# Allegro board SOLAR_15Nov18.brd
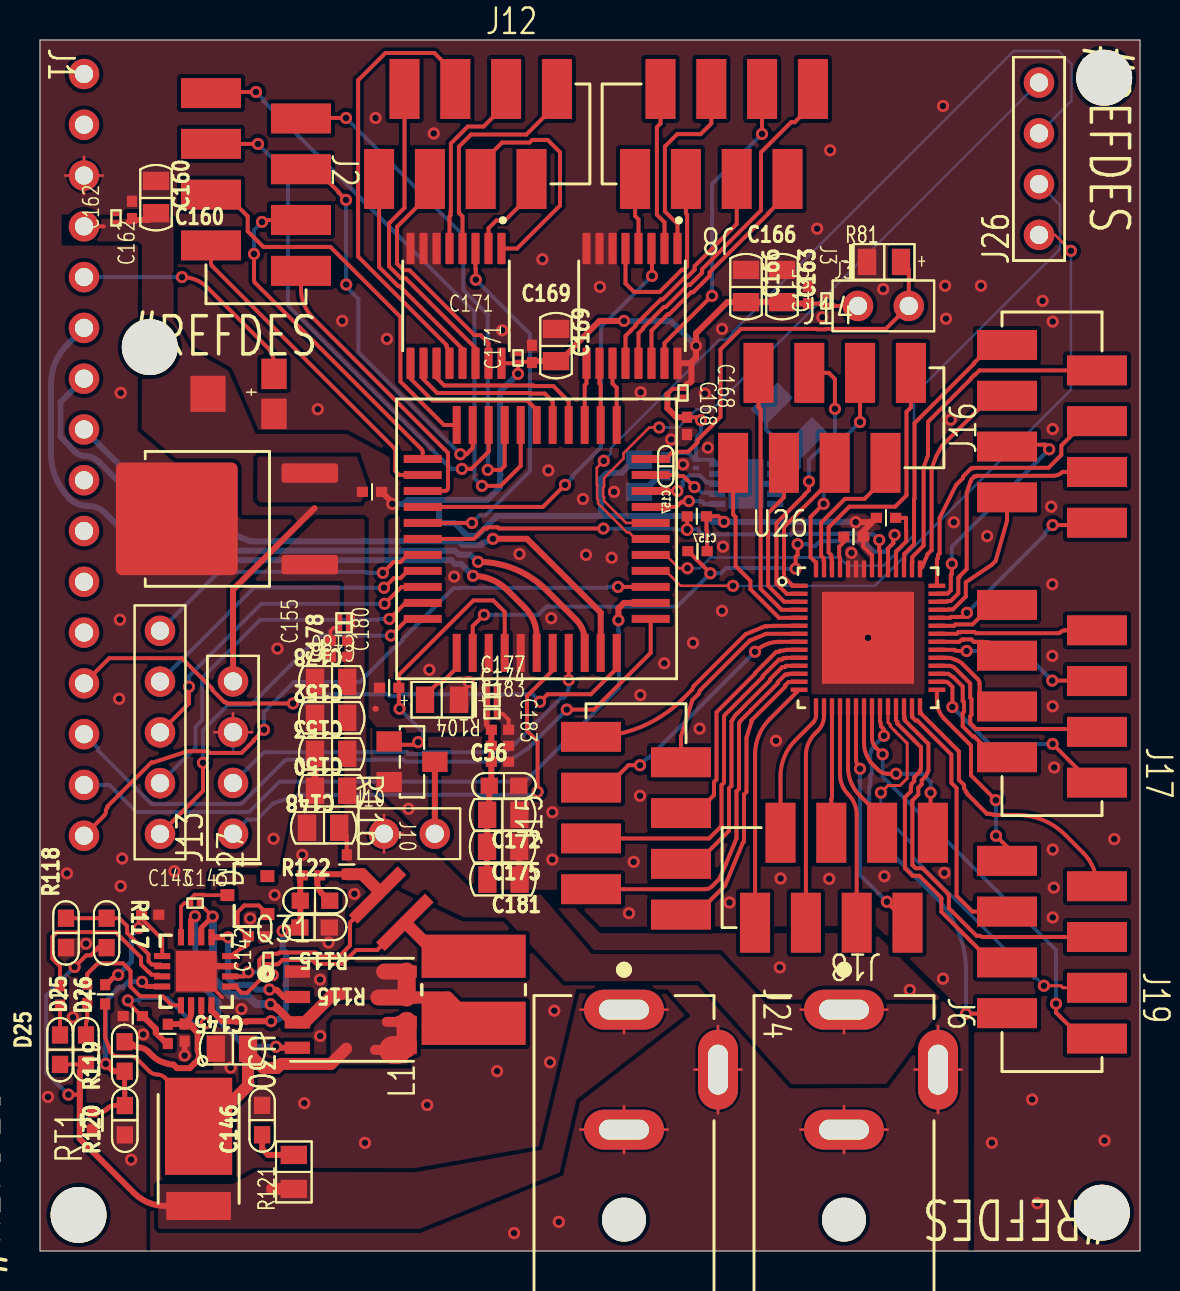
[diagram p0: board, top side]
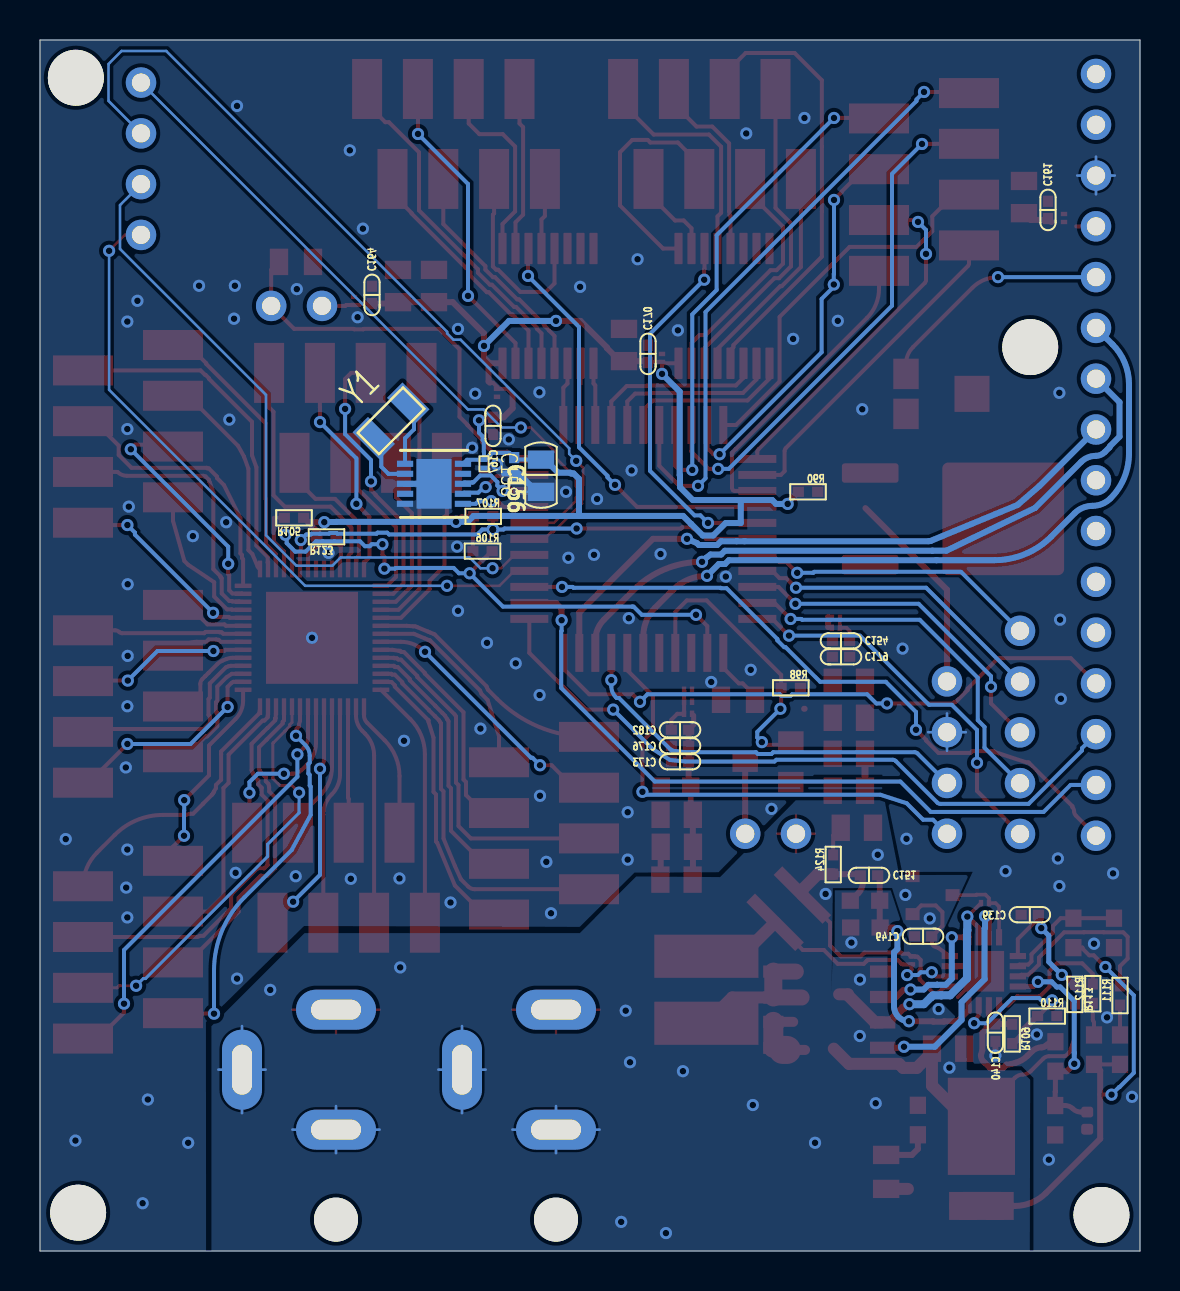
[diagram p1: board, bottom side, seen from below]

Outline 55 x 60.57 mm; copper layers: TOP, BOTTOM. Coordinates in mm from the lower left corner of the outline.
Outline path: 0,60.57 0,0 55,0 55,60.57 0,60.57

## Design rules (mm)
constraint set DEFAULT: min track width 0.127

## Placement (name value [footprint] x y rotation side)
C56  4.7u  [0603G_B]  23.2 23.27 0 top
C139  1u  [0402C_B]  5.51 16.82 0 top
C140  1u  [0402C_B]  7.23 10.92 270 top
C142  0.1uF  [0201]  11.4 14.54 90 top
C143  0.1uF  [0201]  7.75 17.4 0 top
C145  10u  [0805G]  9.64 10.12 180 top
C146  2.2uF  [0603G_B]  11.11 6.55 90 top
C148  4.7uF  [0805G]  14.2 21.17 180 top
C149  1u  [0402C_B]  10.85 15.74 0 top
C150  10u  [0805G]  14.6 23.02 180 top
C151  4.7uF  [0402C_B]  13.55 18.79 180 top
C152  10u  [0805G]  14.6 26.67 180 top
C153  10u  [0805G]  14.6 24.87 180 top
C154  1u  [0402C_B]  14.95 30.52 180 top
C155  0.1uF  [0201]  15.2 31.17 180 top
C156  10u  [0805G]  29.95 38.82 270 bottom
C157  1u  [0402C_B]  31.29 39.25 270 bottom
C158  0.1uF  [0201]  32.8 39.37 270 bottom
C160  10u  [0805G]  5.8 52.67 90 top
C161  1u  [0402C_B]  4.6 52.07 90 top
C162  0.1uF  [0201]  3.8 51.67 90 top
C163  10u  [0805G]  37.1 48.22 90 top
C164  1u  [0402C_B]  38.4 47.82 90 top
C165  0.1uF  [0201]  39.3 47.52 90 top
C166  10u  [0805G]  35.3 48.22 90 top
C167  1u  [0402C_B]  32.35 41.27 270 top
C168  0.1uF  [0201]  32.15 42.92 270 top
C169  10u  [0805G]  25.8 45.27 90 top
C170  1u  [0402C_B]  24.6 44.87 90 top
C171  0.1uF  [0201]  23.9 44.67 90 top
C172  10u  [0805G]  23.12 21.82 0 top
C173  1u  [0402C_B]  23 24.47 0 top
C174  0.1uF  [0201]  22.6 27.47 0 top
C175  10u  [0805G]  23.12 20.22 0 top
C176  1u  [0402C_B]  23 25.27 0 top
C177  0.1uF  [0201]  22.6 28.07 0 top
C178  10u  [0805G]  14.6 28.47 180 top
C179  1u  [0402C_B]  14.95 29.72 180 top
C180  0.1uF  [0201]  15.2 31.67 180 top
C181  10u  [0805G]  23.13 18.58 0 top
C182  1u  [0402C_B]  23 26.07 0 top
C183  0.1uF  [0201]  22.6 26.87 0 top
D25  150060GS75000  [0603G_B]  1 10.07 90 top
D26  150060RS75000  [0603G_B]  2.3 10.07 90 top
D27  BAT54C/SOT  [SOT23-R]  10.37 17.8 90 top
J1  LCD Conn  [JUMPER16X1]  2.2 58.87 270 top
J2  KEYPAD CONN  [HEADER_8_SMT_254MM]  10.8 53.47 270 top
J3  MagSensor CONN  [JUMPER2]  40.9 47.27 0 top
J6  CON2  [DC_JACK]  41.2 7.07 270 top
J8  HEADER 8  [HEADER_8_SMT_254MM]  34.2 55.87 180 top
J9  HEADER 5  [JUMPER5]  6 31.02 270 top
J10  Fan Conn  [JUMPER2]  17.2 20.87 0 top
J12  HEADER 8  [HEADER_8_SMT_254MM]  21.4 55.87 0 top
J13  HEADER 4  [JUMPER4]  9.65 20.87 90 top
J14  HEADER 8  [HEADER_8_SMT_254MM]  39.1 41.67 0 top
J15  HEADER 8  [HEADER_8_SMT_254MM]  29.8 21.27 90 top
J16  HEADER 8  [HEADER_8_SMT_254MM]  50.6 40.87 90 top
J17  HEADER 8  [HEADER_8_SMT_254MM]  50.6 27.87 270 top
J18  HEADER 8  [HEADER_8_SMT_254MM]  40.2 18.67 180 top
J19  HEADER 8  [HEADER_8_SMT_254MM]  50.6 15.07 270 top
J24  CON2  [DC_JACK]  30.2 7.07 270 top
J26  HEADER 4  [JUMPER4]  49.95 50.82 90 top
L1  10uH  [INDM5252X180N]  21.68 13.07 90 top
Q1  MOSFET N  [SOT23-3A]  18.6 24.47 270 top
Q31  Si7288  [MOSFET_SI7272DP-T1-GE3]  15.6 12.07 0 top
R80  858-35WR1KLFTR  [VARR]  10.6 42.87 90 top
R81  2.1K  [0805D]  42.2 49.47 0 top
R90  0  [0402R_B]  16.6 37.97 0 top
R98  10K  [0402R_B]  17.46 28.17 0 top
R104  100ohm  [0805D]  20.1 27.57 180 top
R105  1K  [0402R_B]  42.3 36.67 180 top
R106  1K  [0402R_B]  32.87 35 0 top
R107  1K  [0402R_B]  32.84 36.75 0 top
R109  0Ohm  [0402R_B]  6.39 10.86 90 top
R110  0Ohm  [0402R_B]  4.64 11.75 0 top
R111  10K  [0402R_B]  1 12.78 270 top
R112  10K  [0402R_B]  2.36 12.87 270 top
R113  10 Ohm  [0402R_B]  3.26 12.84 90 top
R115  270k  [0603G_B]  13.73 16.18 180 top
R116  30 mOhm  [CAPC1632X76N]  17.56 17.12 315 top
R117  499k  [0603G_B]  3.33 15.91 270 top
R118  47k  [0603G_B]  1.3 15.91 90 top
R119  5.23k  [0603G_B]  4.23 9.73 90 top
R120  30.1k  [0603G_B]  4.24 6.54 90 top
R121  2 Ohm  [0805R]  12.69 3.96 90 top
R122  499k  [0603G_B]  13.75 17.52 0 top
R123  0  [0402R_B]  40.67 35.72 180 top
R124  0Ohm  [0402R_B]  15.34 19.33 270 top
RT1  THERMISTOR  [CAPC1005X55N]  2.64 6.52 90 top
U17  PCF85063BTL  [DFN-10_DD]  35.3 38.37 180 bottom
U19  STC15_LQFP44  [LQFP-44]  24.84 35.62 0 top
U20  NCP5501UG  [DPAK229P990X238-3N]  11.35 36.62 90 top
U23  SN74LV4051A-Q1  [SOP65P640X120-16N]  20.8 47.27 270 top
U24  SN74LV4051A-Q1  [SOP65P640X120-16N]  29.6 47.27 270 top
U26  PI4IOE5V96248  [PI4IOE5V96248ZLEX-56N]  41.4 30.67 0 top
U28  BQ24650  [QFN50P350X350X100-17N]  7.81 13.99 0 top
U30  PDS1040L  [DIO_SBR10U200P5_13]  7.93 3.11 270 top
UNK#REFDES  -  [unnamed]  53.21 58.68 270 top
UNK#REFDES#2  -  [unnamed]  1.93 1.81 180 top
UNK#REFDES#3  -  [unnamed]  5.49 45.21 0 top
UNK#REFDES#4  -  [unnamed]  53.09 1.92 180 top
Y1  32.768kHz  [XTAL320X150X90]  37.45 41.52 135 bottom

## Library data of the parts
C56 C139 C140 C145 C149 C150 C152-C154 C156 C157 C160 C161 C163 C164 C166 C167 C169 C170 C172 C173 C175 C176 C178 C179 C181 C182 = CAP
C142 C143 C146 C148 C151 C155 C158 C162 C165 C168 C171 C174 C177 C180 C183 = CAPACITOR NON-POL
D25 D26 = LED
D27 = BAT54C/SOT
J1 = HEADER 16
J2 J8 J12 J14-J19 = HEADER 8
J3 = HEADER 2
J6 J24 = CON2_1
J9 = HEADER 5
J10 = CON2
J13 J26 = HEADER 4
L1 = INDUCTOR
Q1 = MOSFET N_1
Q31 = Si7288_0
R80 = RESISTOR VAR
R81 R104 = RESISTOR
R90 R98 R105-R107 R109-R113 R115-R124 = R
RT1 = THERMISTOR
U17 = PC85063BTL_1
U19 = STC15
U20 = NCP5501UG
U23 U24 = SN74LV4051A-Q1
U26 = PI4IOE5V96248
U28 = BQ24650_3
U30 = PDS1040L_0
Y1 = CRYSTAL

## Footprints (pads in the part's own frame, mm; a bottom-side part is the same pattern mirrored in y, then rotated)
0201
  rect 0.22x0.32 smd: 1(-0.203,0) 2(0.197,0)
0402C_B
  rect 0.559x0.508 smd: 1(-0.432,0) 2(0.432,0)
0402R_B
  rect 0.559x0.508 smd: 1(-0.483,0) 2(0.483,0)
0603G_B
  rect 0.864x0.813 smd: 1(-0.737,0) 2(0.737,0)
0805D
  rect 0.914x1.321 smd: 1(0.85,0) 2(-0.85,0)
0805G
  rect 0.914x1.321 smd: 1(-0.762,0) 2(0.85,0)
0805R
  rect 0.914x1.321 smd: 1(-0.85,0) 2(0.85,0)
CAPC1005X55N
  custom 0.54x0.6 smd: 1(-0.43,0) 2(0.43,0)
CAPC1632X76N
  rect 0.61x3.454 smd: 1(-0.965,0) 2(0.965,0)
DC_JACK
  round 2.2 hole 2.2 unplated: (5.5,-1)
  oval 4x2 hole 2.5x1: 1(-2,3.7)
  oval 2x4 hole 1x2.5: 2(1,-1) 3(-5,-1)
DFN-10_DD
  rect 0.813x0.305 smd: 1(-1.448,1) 2(-1.448,0.5) 3(-1.448,0) 4(-1.448,-0.5) 5(-1.448,-1) 6(1.448,-1) 7(1.448,-0.5) 8(1.448,0) 9(1.448,0.5) 10(1.448,1)
  rect 1.753x2.489 smd: 11(0,0)
DIO_SBR10U200P5_13
  rect 1.4x1.39 smd: 1(0.856,0.92) 2(0.856,-0.92)
  rect 4.86x3.36 smd: 3(-3.126,0)
DPAK229P990X238-3N
  custom 0.97x2.83 smd: 1(-2.29,-2.14) 3(2.29,-2.14)
  custom 5.63x6.09 smd: 4(0,4.51)
HEADER_8_SMT_254MM
  rect 1.5x3 smd: 1(-4.445,-2.25) 2(-3.175,2.25) 3(-1.905,-2.25) 4(-0.635,2.25) 5(0.635,-2.25) 6(1.905,2.25) 7(3.175,-2.25) 8(4.445,2.25)
INDM5252X180N
  rect 2.159x5.207 smd: 1(-1.676,0) 2(1.676,0)
JUMPER2
  round 1.524 hole 0.914: 1(0,0) 2(2.54,0)
JUMPER4
  round 1.524 hole 0.914: 1(0,0) 2(2.54,0) 3(5.08,0) 4(7.62,0)
JUMPER5
  round 1.524 hole 0.914: 1(0,0) 2(2.54,0) 3(5.08,0) 4(7.62,0) 5(10.16,0)
JUMPER16X1
  round 1.524 hole 0.914: 1(0,0) 2(2.54,0) 3(5.08,0) 4(7.62,0) 5(10.16,0) 6(12.7,0) 7(15.24,0) 8(17.78,0) 9(20.32,0) 10(22.86,0) 11(25.4,0) 12(27.94,0) 13(30.48,0) 14(33.02,0) 15(35.56,0) 16(38.1,0)
LQFP-44
  rect 1.9x0.4 smd: 1(-5.7,4) 2(-5.7,3.2) 3(-5.7,2.4) 4(-5.7,1.6) 5(-5.7,0.8) 6(-5.7,0) 7(-5.7,-0.8) 8(-5.7,-1.6) 9(-5.7,-2.4) 10(-5.7,-3.2) 11(-5.7,-4) 23(5.7,-4) 24(5.7,-3.2) 25(5.7,-2.4) 26(5.7,-1.6) 27(5.7,-0.8) 28(5.7,0) 29(5.7,0.8) 30(5.7,1.6) 31(5.7,2.4) 32(5.7,3.2) 33(5.7,4)
  rect 0.4x1.9 smd: 12(-4,-5.7) 13(-3.2,-5.7) 14(-2.4,-5.7) 15(-1.6,-5.7) 16(-0.8,-5.7) 17(0,-5.7) 18(0.8,-5.7) 19(1.6,-5.7) 20(2.4,-5.7) 21(3.2,-5.7) 22(4,-5.7) 34(4,5.7) 35(3.2,5.7) 36(2.4,5.7) 37(1.6,5.7) 38(0.8,5.7) 39(0,5.7) 40(-0.8,5.7) 41(-1.6,5.7) 42(-2.4,5.7) 43(-3.2,5.7) 44(-4,5.7)
MOSFET_SI7272DP-T1-GE3
  rect 1.27x0.61 smd: 1(-2.732,1.905) 2(-2.732,0.635) 3(-2.732,-0.635) 4(-2.732,-1.905)
  rect 1.02x0.61 smd: 5(2.732,-1.905) 6(2.732,-0.61) 7(2.732,0.61) 8(2.732,1.905)
PI4IOE5V96248ZLEX-56N
  custom 0.84x0.22 smd: 1(-3.445,2.6) 2(-3.445,2.2) 3(-3.445,1.8) 4(-3.445,1.4) 5(-3.445,1) 6(-3.445,0.6) 7(-3.445,0.2) 8(-3.445,-0.2) 9(-3.445,-0.6) 10(-3.445,-1) 11(-3.445,-1.4) 12(-3.445,-1.8) 13(-3.445,-2.2) 14(-3.445,-2.6) 29(3.445,-2.6) 30(3.445,-2.2) 31(3.445,-1.8) 32(3.445,-1.4) 33(3.445,-1) 34(3.445,-0.6) 35(3.445,-0.2) 36(3.445,0.2) 37(3.445,0.6) 38(3.445,1) 39(3.445,1.4) 40(3.445,1.8) 41(3.445,2.2) 42(3.445,2.6)
  custom 0.22x0.84 smd: 15(-2.6,-3.445) 16(-2.2,-3.445) 17(-1.8,-3.445) 18(-1.4,-3.445) 19(-1,-3.445) 20(-0.6,-3.445) 21(-0.2,-3.445) 22(0.2,-3.445) 23(0.6,-3.445) 24(1,-3.445) 25(1.4,-3.445) 26(1.8,-3.445) 27(2.2,-3.445) 28(2.6,-3.445) 43(2.6,3.445) 44(2.2,3.445) 45(1.8,3.445) 46(1.4,3.445) 47(1,3.445) 48(0.6,3.445) 49(0.2,3.445) 50(-0.2,3.445) 51(-0.6,3.445) 52(-1,3.445) 53(-1.4,3.445) 54(-1.8,3.445) 55(-2.2,3.445) 56(-2.6,3.445)
  rect 4.6x4.6 smd: 57(0,0)
QFN50P350X350X100-17N
  rect 0.813x0.305 smd: 1(-1.702,0.762) 2(-1.702,0.254) 3(-1.702,-0.254) 4(-1.702,-0.762) 9(1.702,-0.762) 10(1.702,-0.254) 11(1.702,0.254) 12(1.702,0.762)
  rect 0.305x0.813 smd: 5(-0.762,-1.702) 6(-0.254,-1.702) 7(0.254,-1.702) 8(0.762,-1.702) 13(0.762,1.702) 14(0.254,1.702) 15(-0.254,1.702) 16(-0.762,1.702)
  rect 2.032x2.032 smd: 17(0,0)
SOP65P640X120-16N
  custom 1.57x0.41 smd: 1(-2.87,2.275) 2(-2.87,1.625) 3(-2.87,0.975) 4(-2.87,0.325) 5(-2.87,-0.325) 6(-2.87,-0.975) 7(-2.87,-1.625) 8(-2.87,-2.275) 9(2.87,-2.275) 10(2.87,-1.625) 11(2.87,-0.975) 12(2.87,-0.325) 13(2.87,0.325) 14(2.87,0.975) 15(2.87,1.625) 16(2.87,2.275)
SOT23-3A
  rect 1.016x1.27 smd: 1(-1.016,-1.143) 2(1.016,-1.143) 3(0,1.143)
SOT23-R
  rect 0.6x0.7 smd: 1(-0.95,-1) 2(0.95,-1) 3(0,1)
unnamed
  round 2.794 hole 2.794: 1(0,0)
VARR
  rect 1.524x1.27 smd: 1(-1,-1.1) 2(1,-1.1)
  rect 1.803x1.753 smd: 3(0,2.2)
XTAL320X150X90
  rect 1.092x1.905 smd: 1(-1.219,0) 2(1.219,0)

## Nets
VCC: C56.1 C156.1 C157.1 C158.1 C160.1 C161.1 C162.1 C163.1 C164.1 C165.1 C166.1 C167.1 C168.1 C169.1 C170.1 C171.1 C172.1 C173.1 C174.1 C175.1 C176.1 C177.1 C181.1 C182.1 C183.1 J1.4 J3.1 J13.4 R80.3 R90.2 R98.1 R105.2 R106.2 R107.2 R123.1 U17.10 U19.14 U23.16 U24.16 U26.49
VIN_SOLAR: D25.1 D26.1 J24.3 R117.2 R121.1 U30.1 U30.2
0: C56.2 C139.2 C140.2 C145.2 C146.2 C148.2 C149.2 C150.2 C152.2 C153.2 C154.2 C155.2 C156.2 C157.2 C158.2 C160.2 C161.2 C162.2 C163.2 C164.2 C165.2 C166.2 C167.2 C168.2 C169.2 C170.2 C171.2 C172.2 C173.2 C174.2 C175.2 C176.2 C177.2 C178.2 C179.2 C180.2 C181.2 C182.2 C183.2 J1.3 J6.1 J6.2 J13.3 J24.1 J24.2 Q1.2(SOURCE) Q31.1 R80.1 R81.2 R104.2 R110.1 R115.1 R118.1 R120.1 RT1.1 U17.3 U17.5(VSS) U17.11 U19.16 U20.4 U23.6 U23.7 U23.8 U24.6 U24.7 U24.8 U26.50 U26.51 U26.52 U26.57 U28.11 U28.17
ADC0: U19.4 U24.3
ADC0_A: U19.34 U24.11
ADC0_B: U19.35 U24.10
ADC0_C: U19.36 U24.9
ADC0_I0: J8.1 U24.13
ADC0_I1: J8.2 U24.14
ADC0_I2: J8.3 U24.15
ADC0_I3: J8.4 U24.12
ADC0_I4: J8.5 U24.1
ADC0_I5: J8.6 U24.5
ADC0_I6: J8.7 U24.2
ADC0_I7: J8.8 U24.4(Y7)
ADC0_I8: J12.1 U23.13
ADC0_I9: J12.2 U23.14
ADC0_I10: J12.3 U23.15
ADC0_I11: J12.4 U23.12
ADC0_I12: J12.5 U23.1
ADC0_I13: J12.6 U23.5
ADC0_I14: J12.7 U23.2
ADC0_I15: J12.8 U23.4(Y7)
ADC1: U19.5 U23.3
ADC1_A: U19.37 U23.11
ADC1_B: U19.38 U23.10
ADC1_C: U19.39 U23.9
ADC2: J9.1 U19.7
ADC3: J9.2 U19.8
ADC4: J9.3 U19.9
ADC5: J9.4 U19.10
ADC6: J9.5 U19.11(XTAL2/RXD_3/ADC6/P1.6)
FAN+V: J10.2 Q1.3
KP1: J2.1 U19.40
KP2: J2.2 U19.41
KP3: J2.3 U19.42
KP4: J2.4 U19.43
KP5: J2.5 U19.44
KP6: J2.6 U19.1
KP7: J2.7 U19.2
KP8: J2.8 U19.3
LCD_CONTRAST: J1.5 R80.2(WIPER)
LCD_D5: J1.13 U19.22
LCD_D6: J1.14 U19.23
LCD_D7: J1.15 U19.24
LCD_D8: J1.16 U19.25
LCD_EN: J1.8 U19.21
LCD_RS: J1.6 U19.17
LCD_RW: J1.7 U19.20
LD_GRN_CHRG: D25.2(CATHODE) R111.2
LD_RD_CHRG: D26.2(CATHODE) R112.2
P5.5_FANCTRL: Q1.1 R98.2 U19.15
P23_MAGSENSOR: J3.2 R81.1 U19.33
PCF85063BTL_CE: U17.6 U19.30
PCF85063BTL_SCL: U17.7 U19.32
PCF85063BTL_SDIO: U17.8 U19.31
RTC_XTAL1: U17.1 Y1.2
RTC_XTAL2: U17.2 Y1.1
STAT1: R111.1 U28.3
STAT2: R112.1 U28.5
STC_IOEXPDR_SCL: R106.1 U19.13 U26.47
STC_IOEXPDR_SDA: R107.1 U19.6 U26.48
STC_RXD: J13.1 U19.18
STC_TXD: J13.2 U19.19
TEMPERATURE: R104.1 U19.12
V_5V_BEFORE_R: R90.1 U20.3(VOUT)
VMAIN_6V: C148.1 C150.1 C152.1 C153.1 C154.1 C155.1 C178.1 C179.1 C180.1 J6.3 J10.1 R124.1 U20.1
N5281104: R105.1 U26.46
N5281708: J16.1 U26.38
N5281710: J16.2 U26.39
N5281712: J16.3 U26.40
N5281714: J16.4 U26.41
N5281716: J16.5 U26.42
N5281718: J16.6 U26.43
N5281720: J16.7 U26.44
N5281722: J16.8 U26.45(IO5_7)
N5281756: J14.1 U26.5
N5281758: J14.2 U26.4
N5281760: J14.3 U26.3
N5281762: J14.4 U26.2
N5281764: J14.5 U26.1
N5281766: J14.6 U26.56
N5281768: J14.7 U26.55
N5281770: J14.8 U26.54
N5281960: J15.1 U26.13
N5281966: J15.2 U26.12
N5281972: J15.3 U26.11
N5281978: J15.4 U26.10
N5281984: J15.5 U26.9
N5281990: J15.6 U26.8
N5281996: J15.7 U26.7
N5282002: J15.8 U26.6
N5282607: J17.1 U26.37
N5282609: J17.2 U26.36
N5282611: J17.3 U26.35
N5282613: J17.4 U26.34
N5282615: J17.5 U26.33
N5282617: J17.6 U26.32
N5282619: J17.7 U26.31
N5282621: J17.8 U26.30
N5282705: J18.1 U26.21
N5282707: J18.2 U26.20
N5282709: J18.3 U26.19
N5282711: J18.4 U26.18
N5282713: J18.5 U26.17
N5282715: J18.6 U26.16
N5282717: J18.7 U26.15
N5282719: J18.8 U26.14
N5282803: J19.1 U26.29
N5282805: J19.2 U26.28
N5282807: J19.3 U26.27
N5282809: J19.4 U26.26
N5282811: J19.5 U26.25
N5282813: J19.6 U26.24
N5282815: J19.7 U26.23
N5282817: J19.8 U26.22
N5297541: C140.1 R109.2 R119.2 U28.6(VREF)
N5297885: C143.1 D27.3 U28.16
N5297889: C143.2 L1.1 Q31.3(S2) Q31.7 Q31.8 U28.14
N5298100: R109.1 R110.2 U28.7
N5300450: C149.1 D27.1 U28.12
N5300470: C142.1 L1.2 R116.2 U28.10
N5300474: C142.2 C151.1 R116.1 R122.2 R124.2 U28.9
N5300499: Q31.2 U28.13
N5300503: Q31.4 U28.15
N5300584: C151.2 R115.2 R122.1 U28.8
N5302120: C139.1 R113.2 U28.1
N5302799: C145.1 Q31.5 Q31.6 R113.1 U30.3
N5307205: R117.1 R118.2 U28.2
N5307428: R119.1 R120.2 RT1.2 U28.4
N5310551: C146.1 R121.2
N5327580: R123.2 U26.53
N5329171: J26.1 U19.26
N5329180: J26.2 U19.27
N5329189: J26.3 U19.28
N5329196: J26.4 U19.29

Pads without a net: D27 2; J1 1 2 9 10 11 12; U17 4 9; UNK#REFDES 1; UNK#REFDES#2 1; UNK#REFDES#3 1; UNK#REFDES#4 1

## Via types
v1: diameter 0.61, hole 0.33, TOP to BOTTOM, 214 vias

## Routing (per net, layer and track width the routed paths; a pad name or vN(x,y) marks a point on that pad's centre or on a via; arc(x,y) is an arc through that point)
VCC: length 102
  TOP w0.2: R106.2 33.36,36.02 33.32,36.05 R107.2 33.92,36.75 v1(34.2,36.47) ; U23.16 23.83,44.4 C171.1 ; U26.49 41.6,34.8 41.16,35.24 R123.1 ; C167.1 32.9,41.7 v1(33.05,41.55) ; C164.1 38.96,47.39 39.03,47.32 C165.1 39.69,47.32 39.73,47.27 J3.1 ; C171.1 23.9,43.87 ; C171.1 24.57,44.47 C170.1 ; J1.4 3.19,51.25 ; 32.51,43.43 32.35,43.43 32.15,43.23 C168.1 31.63,43.12 31.37,42.86
  TOP w0.25: 22.32,26.79 22.32,26.32 C182.1
  TOP w0.3: C164.1 37.17,47.39 C163.1 C166.1 34.36,47.46 32.8,45.9 v1(32.8,45.27) 32.8,44.69 32.51,44.4 32.51,44.4 ; C181.1 22.35,18.59 C175.1 22.36,20.22 C172.1 22.46,21.92 C56.1 22.57,23.37 C173.1 C176.1 C182.1 ; C167.1 31.82,41.7 31.37,42.15 31.37,42.86 ; 13.73,37.16 9.65,33.08 J13.4 ; 41.33,35.65 41.08,35.89 41.08,35.93 41.56,36.41 41.56,36.44 ; R90.2 17.62,37.44 v1(17.62,37.37) ; 32.51,44.4 32.57,44.34 32.57,43.49 32.51,43.43 ; 32.51,44.4 U24.16 ; 41.56,36.44 41.55,36.45 v1(40.79,36.45) ; 41.56,36.44 41.79,36.67 R105.2 ; C170.1 24.67,44.51 C169.1 26,44.51 26.66,45.16 26.66,45.2 27.98,46.52 v1(29.2,46.52) ; C160.1 5.46,51.57 4.67,51.57 C161.1 4.43,51.47 ; 16.79,27.12 16.77,27.12
  BOTTOM w0.2: C158.1 33.65,39.57 U17.10 ; C158.1 32.8,39.96 32.81,39.97 32.81,40.51 32.87,40.57 32.87,40.74 33.05,40.92 v1(33.05,41.55) ; C158.1 32.75,39.57 32.48,39.84 32.47,39.84 32.39,39.92 31.53,39.92 C157.1 31.19,39.58 30.26,39.58
  BOTTOM w0.3: 19.96,37.56 18.39,37.56 18.2,37.37 v1(17.62,37.37) ; 19.96,37.56 19.96,36.41 20.72,36.41 21.34,35.79 21.86,35.79 22.44,36.37 22.45,36.37 22.85,36.77 28.05,36.77 ; 19.96,37.56 22.36,37.56 23,38.2 23,38.79 23.02,38.81 23.02,42.99 v1(23.9,43.87) ; v1(40.79,36.45) 40.57,36.45 40.56,36.46 40.2,36.46 40.19,36.47 v1(34.2,36.47) 33.62,36.47 33.32,36.77 28.05,36.77 ; 28.05,36.77 28.05,38.62 28.32,38.89 28.45,38.89 28.49,38.93 29.09,38.93 29.75,39.58 C156.1 30.26,39.58 ; v1(29.2,46.52) 31.55,46.52 v1(32.8,45.27)
VIN_SOLAR: length 30
  TOP w0.127: 29.2,10.89 J24.3 ; J24.3 27.02,12.07 ; J24.3 31.38,12.07
  TOP w0.2: R117.2 2.88,15.17 2.88,15.17 2.88,15.13 2.54,14.79 2.31,14.79 v1(1.73,14.21) ; 1.99,7.83 1.98,7.82 v1(1.42,7.82) ; D25.1 D26.1
  TOP w0.3: D26.1 1.99,9.02 1.99,5.61 4.7,2.9 arc(5.42,2.42) 6.26,2.25 U30.2
  TOP w0.6: 11.6,3.11 R121.1
  TOP w1.4: U30.1 U30.2
  BOTTOM w0.2: v1(1.73,14.21) 0.31,12.79 0.31,8.91 1.02,8.2 1.05,8.2 v1(1.42,7.82)
0: length 84.2
  TOP w0.127: J13.3 9.65,26.89 ; J13.3 8.71,25.95 ; J13.3 10.59,25.95 ; 38.02,6.07 J6.2 ; J6.2 40.2,7.25 ; J6.2 42.38,6.07 ; J6.2 40.2,4.89 ; J24.1 35.08,9.07 ; J24.1 33.9,11.25 ; J24.1 33.9,6.89 ; J24.1 32.72,9.07 ; J24.2 29.2,7.25 ; J24.2 29.2,4.89 ; J24.2 27.02,6.07 ; J24.2 31.38,6.07 ; J1.3 3.14,53.79 ; J1.3 2.2,52.85 ; J1.3 1.26,53.79 ; J1.3 2.2,54.73 ; J6.1 46.08,9.07 ; J6.1 44.9,11.25 ; J6.1 43.72,9.07 ; J6.1 44.9,6.89 ; U28.11 9.51,14.24
  TOP w0.15: U28.17 7.81,13.8
  TOP w0.18: U28.17 9.11,12.69 ; C180.2 C155.2 14.68,31.17 14.52,31.01 C154.2
  TOP w0.2: C177.2 C174.2 C183.2 23.13,26.87 23.43,26.57 C182.2
  TOP w0.3: C140.2 v1(7.23,9.78) ; U28.11 8.09,14.24 7.84,13.99 ; C181.2 23.96,18.59 C175.2 ; U28.17 7.81,14.05
  TOP w0.35: C150.2 C153.2
  TOP w0.4: U28.17 7.84,13.99
  BOTTOM w0.127: J24.2 29.2,7.25 ; J24.2 31.38,6.07 ; J24.2 29.2,4.89 ; J24.2 27.02,6.07 ; J1.3 3.14,53.79 ; J1.3 2.2,52.85 ; J1.3 2.2,54.73 ; J1.3 1.26,53.79 ; 30.79,37.97 30.15,37.97 ; 8.71,25.95 J13.3 ; J13.3 10.59,25.95 ; J13.3 9.65,26.89 ; J13.3 9.65,25.01 ; 44.9,6.89 J6.1 ; J6.1 46.08,9.07 ; J6.1 43.72,9.07 ; J6.1 44.9,11.25 ; 33.9,6.89 J24.1 ; J24.1 35.08,9.07 ; J24.1 32.72,9.07 ; J24.1 33.9,11.25 ; 40.2,4.89 J6.2 ; J6.2 42.38,6.07 ; J6.2 40.2,7.25 ; J6.2 38.02,6.07
  BOTTOM w0.3: U17.3 U17.11 ; C156.2 30.15,37.97 31.07,38.89 31.8,38.89
  vias: v1(0.4,7.71) v1(1.35,18.89) v1(1.65,11.69) v1(2.3,15.37) v1(4.03,42.92) v1(4,31.58) v1(3.96,27.62) v1(4.03,18.25) v1(4.11,19.63) v1(4.56,4.57) v1(5.16,10.83) v1(6.72,19) v1(9.53,9.17) v1(10.07,12.1) v1(10.51,16.63) v1(11.68,20.62) v1(11.73,17.81) v1(11.87,30.13) v1(13.11,19.82) v1(13.22,7.39) v1(13.89,42.1) v1(14,13.58) v1(14.01,10.75) v1(14.43,15.43) v1(15.11,46.52) v1(15.72,17.86) v1(16.25,5.41) v1(16.78,56.67) v1(17.34,45.62) v1(18.43,22.12) v1(19.36,7.3) v1(19.47,29.07) v1(19.69,55.89) v1(20.71,33.73) v1(21.44,28.46) v1(22.85,9) v1(23.11,46.05) v1(23.7,0.9) v1(23.97,34.86) v1(25.12,49.6) v1(25.42,39.04) v1(25.5,9.44) v1(25.56,31.65) v1(25.62,21.95) v1(25.62,19.58) v1(25.72,12.02) v1(25.94,1.46) v1(27.15,37.61) v1(27.3,34.82) v1(28,48.22) v1(28.58,34.67) v1(28.7,37.97) v1(29.45,16.89) v1(29.68,19.46) v1(30.03,42.95) v1(30.02,27.81) v1(30,22.77) v1(31.21,29.39) v1(31.56,40.59) v1(32.15,39.34) v1(32.65,30.42) v1(32.98,26.13) v1(33.24,42.88) v1(33.39,40.18) v1(34.1,46.12) v1(34.15,35.23) v1(34.1,32.02) v1(34.47,17.43) v1(36.8,25.52) v1(37.03,18.63) v1(36.99,14.18) v1(38.86,51.13) v1(39.12,46.7) v1(39.51,55.05) v1(39.46,18.62) v1(40.57,34.92) v1(41.4,30.67) v1(42.16,48.11) v1(42.22,18.74) v1(43.49,13.06) v1(45.15,13.62) v1(45.15,57.27) v1(45.22,18.92) v1(45.26,48.28) v1(45.3,46.63) v1(45.53,41.58) v1(45.69,36.45) v1(47.05,48.28) v1(47.36,35.76) v1(47.59,5.41) v1(49.61,7.58) v1(49.87,2.39) v1(50.13,47.52) v1(50.63,46.49) v1(50.63,41.11) v1(50.56,37.23) v1(50.62,33.35) v1(50.62,29.77) v1(50.63,27.25) v1(50.63,20.08) v1(50.63,16.68) v1(50.71,24.19) v1(50.69,18.18) v1(53.23,5.52) v1(53.71,20.6)
ADC0: length 21.2
  TOP w0.2: v1(30.6,48.77) 30.6,50.12 U24.3 ; v1(26.25,38.32) 25.14,37.21 U19.4
  BOTTOM w0.2: v1(30.6,48.77) 28.05,46.22 28.05,40.2 26.63,38.78 26.63,38.7 v1(26.25,38.32)
ADC0_A: length 3.2
  TOP w0.2: U19.34 28.84,43.18 28.62,43.39 U24.11
ADC0_B: length 3.1
  TOP w0.2: U24.10 27.97,43.39 28.03,43.33 U19.35
ADC0_C: length 3.1
  TOP w0.2: U19.36 27.24,43.3 27.32,43.39 U24.9
ADC0_I0: length 17.6
  TOP w0.2: U24.13 29.93,45.89 30.15,46.12 30.15,46.17 31.2,47.22 31.29,47.22 32.4,48.33 32.5,48.33 33.11,48.93 33.11,49.11 36.05,52.05 36.05,54.96 37.55,56.46 37.73,56.46 38.65,57.37 J8.1
ADC0_I1: length 12.1
  TOP w0.2: U24.14 30.58,46.04 31.38,46.85 31.45,46.85 32.56,47.95 32.66,47.95 33.48,48.77 33.48,48.95 36.43,51.89 36.43,51.92 37.38,52.87 J8.2
ADC0_I2: length 15.8
  TOP w0.2: U24.15 31.23,45.41 33.6,47.79 v1(33.6,47.77) ; J8.3 36.1,58.11 v1(36.1,55.87)
  BOTTOM w0.2: v1(36.1,55.87) 33.6,53.37 v1(33.6,47.77)
ADC0_I3: length 11.6
  TOP w0.2: 34.84,53.62 34.84,51.37 32.73,49.26 32.73,49.09 32.35,48.7 32.25,48.7 31.14,47.6 31.04,47.6 29.78,46.33 29.78,46.28 29.55,46.05 29.55,46.04 29.27,45.77 U24.12
ADC0_I4: length 9.9
  TOP w0.2: J8.5 33.56,56.39 33.03,55.86 31.86,55.86 31.24,55.24 31.24,52 31.88,51.37 U24.1
ADC0_I5: length 9.9
  TOP w0.2: J8.6 32.29,51.89 32.36,51.83 32.36,49.24 32.19,49.08 32.09,49.08 30.98,47.97 29.7,47.97 29.27,48.4 U24.5
ADC0_I6: length 8.2
  TOP w0.2: J8.7 31.03,56.39 30.84,56.21 30.84,51.83 31.23,51.45 U24.2
ADC0_I7: length 3.6
  TOP w0.2: J8.8 29.75,51.76 29.93,51.59 U24.4
ADC0_I8: length 11
  TOP w0.2: J12.1 16.96,49.21 17.92,48.25 17.99,48.25 21.13,45.12 U23.13
ADC0_I9: length 16
  TOP w0.2: U23.14 21.78,45.16 18.28,48.65 18.05,48.65 17.45,49.25 17.45,51.39 17.52,51.47 17.52,51.47 18.22,52.17 J12.2
ADC0_I10: length 12.2
  TOP w0.2: J12.3 19.5,52.87 17.85,51.23 17.85,49.38 18.18,49.05 18.48,49.05 21.72,45.81 22.03,45.81 22.43,45.41 U23.15
ADC0_I11: length 22.7
  TOP w0.2: U23.12 20.47,45.06 20.33,45.21 20.33,45.31 15.91,49.73 15.91,51.99 15.9,52 15.9,55.24 15.91,55.25 15.91,58.56 17.27,59.92 19.71,59.92 20.76,58.87 20.76,58.12
ADC0_I12: length 11.9
  TOP w0.2: J12.5 22.03,54.37 23.1,55.44 24.48,55.44 24.61,55.57 25.39,55.57 26,54.96 26,52.29 23.85,50.14 U23.1
ADC0_I13: length 9.6
  TOP w0.2: J12.6 23.31,57.37 22.18,56.24 21.39,56.24 20.55,55.4 20.55,52 20.53,51.98 20.53,51.8 20.47,51.74 U23.5
ADC0_I14: length 4.6
  TOP w0.2: J12.7 24.57,52.87 23.25,51.54 22.82,51.54 22.43,51.15 U23.2
ADC0_I15: length 11.7
  TOP w0.2: J12.8 25.84,57.37 24.31,55.84 21.55,55.84 20.95,55.23 20.95,51.92 21.13,51.74 U23.4
ADC1: length 18.7
  TOP w0.2: U23.3 21.78,49.13 21.79,49.11 v1(21.79,48.58) ; v1(21.6,36.42) U19.5
  BOTTOM w0.2: v1(21.79,48.58) 24.5,45.87 24.5,39.02 22.27,36.79 21.98,36.79 v1(21.6,36.42)
ADC1_A: length 9
  TOP w0.2: U19.37 26.43,42.49 25.67,43.26 24.69,43.26 24.66,43.29 20.21,43.29 19.82,43.68 U23.11
ADC1_B: length 8.9
  TOP w0.2: U19.38 25.64,42.49 25.24,42.88 24.53,42.88 24.5,42.91 19.85,42.91 19.17,43.6 U23.10
ADC1_C: length 8.5
  TOP w0.2: U23.9 18.52,43.64 19.62,42.54 24.36,42.54 24.84,42.06 U19.39
ADC2: length 14.7
  TOP w0.2: v1(17.14,33.92) 17.67,34.45 18.02,34.45 18.38,34.81 U19.7
  BOTTOM w0.2: v1(17.14,33.92) 16.34,33.92 16.29,33.97 8.95,33.97 J9.1
ADC3: length 15.4
  TOP w0.2: U19.8 18.38,34.02 18.02,33.65 17.69,33.65 17.38,33.34 17.37,33.34 v1(17.2,33.18)
  BOTTOM w0.2: J9.2 10.69,33.18 v1(17.2,33.18)
ADC4: length 16.9
  TOP w0.2: U19.9 18.07,33.22 v1(17.23,32.37) ; J9.3 7.45,27.39 v1(7.45,28.22)
  BOTTOM w0.2: v1(17.23,32.37) 11.07,32.37 7.45,28.75 v1(7.45,28.22)
ADC5: length 18.7
  TOP w0.2: v1(17.47,31.61) 18.27,32.42 U19.10
  BOTTOM w0.2: J9.4 7.78,25.18 7.78,26.22 8.11,26.55 8.11,28.67 11.01,31.57 16.9,31.57 16.94,31.61 v1(17.47,31.61)
ADC6: length 19.4
  TOP w0.2: J9.5 8.15,23.01 v1(8.15,24.42) ; v1(17.55,30.78) 18.38,31.62 U19.11
  BOTTOM w0.2: v1(17.55,30.78) 14.01,30.78 10.55,27.32 9.41,27.32 8.15,26.06 v1(8.15,24.42)
FAN+V: length 3.6
  TOP w0.3: J10.2 19.74,21.91 19.74,21.91 Q1.3
KP1: length 31
  TOP w0.2: J2.1 8.61,57.97 v1(10.8,57.97) ; U19.40 24.03,39.27 23.03,38.27 v1(22.1,38.27)
  BOTTOM w0.2: v1(22.1,38.27) 21.72,38.65 21.72,46.97 11.18,57.51 11.18,57.59 v1(10.8,57.97)
KP2: length 25.8
  TOP w0.2: v1(22.39,39.07) 23.03,39.07 23.24,39.27 U19.41 ; v1(15.3,56.67) 13.07,56.67 J2.2
  BOTTOM w0.2: v1(15.3,56.67) 21.17,50.8 21.17,48.06 22.39,46.85 v1(22.39,39.07)
KP3: length 26.2
  TOP w0.2: J2.3 10.28,55.38 10.28,55.37 v1(10.9,55.37) ; U19.42 22.44,39.99 21.57,39.12 v1(21.09,39.12)
  BOTTOM w0.2: v1(21.09,39.12) 20.56,39.12 12.4,47.28 12.4,53.87 v1(10.9,55.37)
KP4: length 19.9
  TOP w0.2: v1(15.3,52.57) 14.92,52.95 14.92,52.98 13.8,54.11 J2.4 ; v1(21.02,39.85) 21.02,39.85 21.33,39.85 21.64,40.16 U19.43
  BOTTOM w0.2: v1(21.02,39.85) 15.92,44.95 15.92,47.62 15.31,48.23 v1(15.31,48.34) 15.31,48.87 15.3,48.88 v1(15.3,52.57)
KP5: length 19.4
  TOP w0.2: 8.55,52.83 9.3,52.83 10.39,51.75 10.39,51 11.17,50.22 14.52,50.22 18.02,46.72 18.02,43.49 20.2,41.31 U19.44
KP6: length 17.5
  TOP w0.2: U19.1 19.13,39.96 arc(19.12,40.04) 19.08,40.1 10.76,48.42 arc(10.72,48.48) 10.7,48.56 v1(10.7,49.87) ; v1(11.1,51.47) 11.19,51.56 J2.6
  BOTTOM w0.2: v1(10.7,49.87) 10.7,51.07 v1(11.1,51.47)
KP7: length 16.5
  TOP w0.2: J2.7 8.55,49.4 arc(8.57,49.32) 8.61,49.26 17.71,40.16 arc(17.75,40.09) 17.77,40.02 17.77,39 17.96,38.81 U19.2
KP8: length 15.2
  TOP w0.2: U19.3 20.26,38.02 arc(20.31,38.02) 20.35,38.05 arc(20.39,38.11) 20.4,38.18 20.4,39.87 20.38,39.89 20.38,39.94 20.21,40.12 20.2,40.12 13.65,46.67 arc(13.21,47.34) 13.05,48.12 13.05,49.02
LCD_CONTRAST: length 12
  TOP w0.2: R80.2 11.7,44.36 arc(11.61,44.82) 11.35,45.21 8.38,48.18 arc(7.79,48.57) v1(7.1,48.71)
  BOTTOM w0.2: v1(7.1,48.71) J1.5
LCD_D5: length 30
  TOP w0.2: v1(25,27.47) 25.38,27.85 27.54,27.85 28.84,29.14 28.84,29.91 ; J1.13 3.46,29.65 7.09,29.65 8.61,28.13 8.61,28.06 9.22,27.45 9.29,27.45 9.36,27.39 v1(12.65,27.39)
  BOTTOM w0.2: v1(12.65,27.39) 13.18,27.39 13.64,27.85 17.39,27.85 17.48,27.76 17.92,27.76 18.01,27.85 24.62,27.85 v1(25,27.47)
LCD_D6: length 34.6
  TOP w0.2: U19.23 30.53,29.92 27.7,27.08 v1(26.34,27.08)
  BOTTOM w0.2: v1(26.34,27.08) 24.38,25.12 23.5,24.56 22.73,24.48 18.27,24.48 18.19,24.57 12.36,24.57 arc(12.28,24.55) 12.22,24.51 10.14,22.43 arc(10.06,22.38) 9.97,22.36 5.57,22.36 2.9,25.03 2.9,25.15 J1.14
LCD_D7: length 35.6
  TOP w0.3: v1(28.92,31.55) 28.92,32.13 29.2,32.42 U19.24
  BOTTOM w0.2: v1(28.92,31.55) 28.92,31.02 28.94,31 28.94,28.16 24.26,23.48 11.98,23.48 10.46,21.96 4.82,21.96 3.47,23.31 J1.15
LCD_D8: length 34.2
  TOP w0.2: v1(28.9,33.22) U19.25 ; v1(11.2,26.07) 10.69,25.56 10.69,25.52 10.08,24.91 8.48,24.91 8.39,25 7.31,25 7.27,24.96 5.67,24.44 5.57,24.44 3.38,22.25 3.38,22.19 arc(3.32,22.1) 3.29,21.99 arc(3.27,21.87) 3.21,21.78 J1.16
  BOTTOM w0.2: v1(28.9,33.22) 28.37,33.22 28.32,33.17 20.97,33.17 20.95,33.15 20.67,33.15 18.13,30.61 18.13,30.54 17.79,30.2 17.72,30.2 15.99,28.47 12.71,28.47 11.2,26.96 v1(11.2,26.07)
LCD_EN: length 31.4
  TOP w0.3: v1(22.65,35.62) 24.35,35.62 28.03,31.94 28.03,29.91
  BOTTOM w0.3: J1.8 5.04,38.25 6.12,37.31 10.48,35.51 10.57,35.5 19.77,35.5 20.95,35.5 21.14,35.31 22.06,35.31 22.15,35.41 v1(22.65,35.62)
LCD_RS: length 36.4
  TOP w0.3: 24.84,29.91 24.84,30.75 arc(24.68,31.52) 24.24,32.18 23.36,33.06 arc(22.57,33.59) v1(21.65,33.77)
  BOTTOM w0.3: v1(21.65,33.77) 21.06,34.36 20.75,34.36 20.56,34.55 10.18,34.55 10.18,34.55 7.28,34.55 arc(5.74,34.86) 4.44,35.73 3.27,36.9 arc(2.86,37.17) 2.38,37.27 arc(1.89,37.37) 1.48,37.64 arc(0.79,38.67) 0.55,39.88 0.55,43.35 arc(0.76,44.43) 1.38,45.35 J1.6
LCD_RW: length 34.1
  TOP w0.3: 27.24,29.91 27.24,30.53 arc(27.12,31.1) 26.8,31.58 25.33,33.05 arc(23.75,34.1) v1(21.9,34.47)
  BOTTOM w0.3: v1(21.9,34.47) 21.72,34.65 21.47,34.84 20.95,34.84 20.76,35.02 10.38,35.02 10.37,35.03 9.68,35.03 5.25,37.16 2.94,39.47 arc(2.61,39.69) 2.21,39.77 arc(1.97,39.82) 1.77,39.95 1.53,40.19 1.49,40.26 1.03,40.73 1.03,42.46 J1.7
LD_GRN_CHRG: length 1.5
  TOP w0.2: R111.2 D25.2
LD_RD_CHRG: length 1.6
  TOP w0.2: D26.2 2.3,11.42 arc(2.31,11.46) 2.33,11.5 arc(2.35,11.53) 2.36,11.57 R112.2
P5.5_FANCTRL: length 14.6
  TOP w0.2: 23.24,29.91 23.24,31.96 22.66,32.54 21.67,32.54 17.94,28.81 R98.2 17.94,27.16 v1(17.98,27.12) ; v1(18.91,25.45) 18.78,25.32 17.62,25.32 Q1.1
  BOTTOM w0.2: v1(17.98,27.12) 19.14,25.96 19.14,25.68 v1(18.91,25.45)
P23_MAGSENSOR: length 20.5
  TOP w0.2: U19.33 31.28,39.62 31.65,39.98 32.41,39.98 32.88,40.44 32.88,40.56 33.63,41.31 33.63,41.33 34.02,41.72 34.02,45.09 35.05,46.12 38.82,46.12 38.84,46.1 39.28,46.1 39.3,46.12 42.29,46.12 J3.2 43.44,49.08 R81.1
PCF85063BTL_CE: length 3.5
  TOP w0.2: U19.30 31.82,37.21 32.04,37.44 32.07,37.44 32.11,37.48 32.41,37.48 v1(32.44,37.51)
  BOTTOM w0.2: v1(32.44,37.51) 32.97,37.51 32.99,37.49 33.1,37.49 33.22,37.37 U17.6
PCF85063BTL_SCL: length 3.7
  TOP w0.2: U19.32 31.86,38.81 31.91,38.76 32.16,38.76 32.34,38.58 32.34,38.58 v1(32.72,38.21)
  BOTTOM w0.2: v1(32.72,38.21) 32.81,38.21 33.09,37.93 33.79,37.93 U17.7
PCF85063BTL_SDIO: length 3.9
  TOP w0.2: v1(31.87,38.02) U19.31
  BOTTOM w0.2: U17.8 33.78,38.44 33.4,38.44 33.39,38.44 33.33,38.44 32.99,38.79 32.46,38.79 32.13,38.46 32.13,38.28 v1(31.87,38.02)
RTC_XTAL1: length 3.3
  BOTTOM w0.2: U17.1 36.75,40.65 36.3,41.1 36.3,42.09 Y1.2
RTC_XTAL2: length 2.9
  BOTTOM w0.2: U17.2 37.58,38.87 37.93,39.22 37.93,40.28 Y1.1
STAT1: length 9.3
  TOP w0.2: U28.3 6.01,13.74 5.93,13.82 5.59,13.82 5.45,13.95 5.43,13.95 5.05,14.33 5.05,14.68 3.79,15.94 2.81,15.94 2.8,15.95 1.83,15.95 1.82,15.94 0.84,15.94 0.62,15.72 0.62,14.63 1,14.25 R111.1
STAT2: length 6.7
  TOP w0.2: U28.5 6.59,12.29 6.14,12.74 5.01,12.74 4.53,13.22 4.53,13.99 4.49,14.03 4.49,14.05 4.15,14.39 2.89,14.39 2.36,13.86 R112.1
STC_IOEXPDR_SCL: length 29.2
  TOP w0.2: v1(37.88,35.35) 37.88,34.82 37.78,34.72 v1(37.78,34.13) ; R106.1 32.42,35 32.83,34.59 32.83,34.59 v1(33.52,33.9) ; 21.64,29.91 21.64,31.26 v1(22.2,31.82) ; U26.47 42.4,35.14 42.66,35.4 42.66,35.75 v1(42.73,35.82)
  BOTTOM w0.2: v1(22.2,31.82) 24.91,31.82 25.32,32.23 25.39,32.23 31.85,32.23 v1(33.52,33.9) 34.05,33.9 34.32,34.16 37.21,34.16 37.25,34.13 v1(37.78,34.13) ; v1(42.73,35.82) 42.66,35.75 42.66,35.4 42.24,34.98 41.72,34.98 41.2,35.5 40.85,35.5 40.85,35.5 40.29,35.5 40.29,35.5 39,35.5 38.75,35.25 38.51,35.25 38.41,35.35 v1(37.88,35.35)
STC_IOEXPDR_SDA: length 25.6
  TOP w0.2: v1(28.17,36.14) 22.95,36.14 22.89,36.2 22.41,36.2 22.35,36.14 22.21,36.14 21.69,35.62 U19.6 ; U26.48 42,34.99 41.96,35.03 v1(41.96,35.56) ; R107.1 v1(32.36,36.09)
  BOTTOM w0.2: v1(28.17,36.14) 31.78,36.14 31.83,36.09 v1(32.36,36.09) ; v1(32.35,36.09) 32.88,36.09 33.13,35.84 37.55,35.84 37.64,35.93 38.12,35.93 38.18,35.87 40.13,35.87 40.17,35.91 40.5,35.91 40.54,35.87 41.01,35.87 41.42,35.87 41.46,35.84 41.68,35.84 v1(41.96,35.56)
  vias: v1(32.36,36.09)
STC_RXD: length 23.7
  TOP w0.2: 25.64,29.91 25.64,29.04 24.35,27.76 24.35,26.02 24.88,25.49 v1(24.88,22.97)
  BOTTOM w0.2: v1(24.88,22.97) 24.73,22.82 12.98,22.82 11.67,22.4 10.84,21.57 10.35,21.57 J13.1
STC_TXD: length 20.6
  TOP w0.2: 26.43,29.91 v1(26.43,28.55)
  BOTTOM w0.2: J13.2 11.13,24.89 arc(11.2,24.93) 11.27,24.95 18.34,24.95 18.43,24.86 19.11,24.86 19.2,24.95 22.72,24.95 23.21,25 23.28,25 23.45,25.07 23.48,25.09 26.05,27.66 26.17,27.66 26.21,27.7 arc(26.38,27.95) 26.43,28.24 v1(26.43,28.55)
TEMPERATURE: length 3.1
  TOP w0.2: R104.1 19.25,27.77 19.87,28.39 20.06,28.39 20.84,29.16 20.84,29.91
VMAIN_6V: length 11.3
  TOP w0.127: J6.3 42.38,12.07 ; J6.3 40.2,10.89 ; J6.3 38.02,12.07 ; 16.26,20.87 J10.1 ; J10.1 18.14,20.87 ; J10.1 17.2,21.81 ; J10.1 17.2,19.93
  TOP w0.2: R124.1 15.34,20.79 C148.1
  TOP w0.3: 15.59,31.71 15.59,31.21
N5281104: length 3.3
  TOP w0.2: U26.46 42.8,34.98 43.31,35.49 43.31,36.06 43.3,36.07 43.3,36.66 43.29,36.67 R105.1
N5281708: length 10
  TOP w0.2: v1(46.35,31.92) 46.14,31.71 45.56,31.71 45.51,31.67 U26.38 ; v1(50.63,36.31) 52.73,36.31 J16.1
  BOTTOM w0.2: v1(50.63,36.31) 50.25,35.93 50.25,35.83 v1(46.35,31.92)
N5281710: length 7.5
  TOP w0.2: J16.2 48.35,36.52 47.78,34.51 47.6,34.33 46.29,33.45 46.29,32.74 45.64,32.09 45.41,32.09 45.39,32.07 U26.39
N5281712: length 13.6
  TOP w0.2: U26.40 45.03,32.47 45.04,32.48 45.38,32.48 45.4,32.51 45.53,32.51 45.92,32.89 45.92,33.65 45.97,33.68 45.97,33.72 45.99,33.76 46.33,34.11 46.33,37.93 46.51,38.45 46.55,38.49 46.55,38.57 46.73,38.75 46.8,38.75 46.83,38.77 50.66,38.77 arc(50.91,38.82) 51.12,38.97 J16.3
N5281714: length 12.1
  TOP w0.2: U26.41 44.9,32.87 44.91,32.88 45.38,32.88 45.54,33.05 45.54,33.8 45.59,33.85 v1(45.59,34.37) ; v1(50.46,40.1) 50.46,40.13 50.26,40.33 48.45,40.33 J16.4
  BOTTOM w0.2: v1(45.59,34.37) 45.59,35.23 v1(50.46,40.1)
N5281716: length 13.9
  TOP w0.2: U26.42 44.84,34.6 44.9,34.66 44.9,34.81 44.98,34.89 44.98,36.66 45.8,38.31 46.15,38.66 46.15,38.74 46.56,39.15 46.64,39.15 46.66,39.17 50.42,39.17 51.06,39.81 51.06,40.28 52.15,41.36 arc(52.49,41.47) J16.5
N5281718: length 10.7
  TOP w0.2: 44.01,34.12 U26.43 arc(44.07,34.16) 44.12,34.23 44.38,34.86 44.58,35.06 44.58,39.13 44.8,39.73 44.8,39.73 45.1,40.27 47.34,42.51 arc(47.63,42.71) 47.98,42.78 J16.6
N5281720: length 17.2
  TOP w0.2: U26.44 43.6,34.42 43.61,34.43 43.61,34.71 44.18,35.28 44.18,39.2 44.4,39.8 44.4,41.47 46.55,43.62 46.55,43.65 46.73,43.83 46.75,43.83 46.97,44.05 J16.7
N5281722: length 13.8
  TOP w0.2: J16.8 47.6,45.31 46.69,44.4 46.69,44.37 43.73,41.4 43.73,37.63 43.7,37.61 43.7,35.35 43.21,34.86 43.21,34.56 43.2,34.55 U26.45
N5281756: length 9.7
  TOP w0.2: J14.1 34.66,36.84 34.78,36.71 34.78,34.26 35.52,33.52 35.52,33.1 36.95,31.67 U26.5
N5281758: length 13.2
  TOP w0.2: J14.2 35.93,42.19 36.03,42.09 36.03,33.12 37.08,32.07 U26.4
N5281760: length 8.4
  TOP w0.2: U26.3 37.21,32.47 36.41,33.28 36.41,36.9 37.19,37.69 J14.3
N5281762: length 14.2
  TOP w0.2: v1(39.75,42.12) 39.75,43.62 39.44,43.92 J14.4 ; v1(38.45,38.49) 38.45,38.06 38.22,37.83 38.22,37.81 36.83,36.41 36.83,33.39 37.34,32.87 U26.2
  BOTTOM w0.2: v1(38.45,38.49) 38.45,39.56 39.75,40.86 v1(39.75,42.12)
N5281764: length 7.7
  TOP w0.2: 39.74,39.42 39.74,38.75 37.2,36.21 37.2,33.71 37.64,33.27 U26.1
N5281766: length 10.9
  TOP w0.2: v1(41,41.46) 41,42.19 41,42.19 J14.6 ; v1(39.18,37.37) 38.53,36.72 38.53,34.7 38.8,34.43 U26.56
  BOTTOM w0.2: v1(41,41.46) 39.18,39.64 v1(39.18,37.37)
N5281768: length 7.3
  TOP w0.2: J14.7 42.28,38.67 41.22,37.62 40.25,37.62 39.06,36.43 39.06,34.78 39.19,34.65 39.19,34.52 39.2,34.5 U26.55
N5281770: length 12.9
  TOP w0.2: J14.8 43.54,42.19 43.33,41.97 43.33,37.8 42.76,37.23 40.47,37.23 39.43,36.19 39.43,34.93 39.56,34.8 39.56,34.67 39.59,34.65 39.59,34.13 U26.54
N5281960: length 14.5
  TOP w0.2: J15.1 32.42,16.83 arc(32.77,16.89) 33.06,17.09 34.26,18.28 35.14,20.42 35.2,20.48 35.2,22.83 35.32,22.96 35.32,25.68 35.58,26.48 35.58,26.55 37.26,28.23 37.26,28.29 37.42,28.46 37.55,28.46 37.57,28.47 U26.13
N5281966: length 18.7
  TOP w0.2: U26.12 37.44,28.87 37.4,28.83 37.27,28.83 36.88,28.45 36.88,28.39 35.55,27.06 35.55,27.05 35.25,26.75 35.05,26.55 34.96,26.4 34.95,26.39 34.95,23.11 34.82,22.99 34.82,20.63 34.26,19.27 33.96,18.6 33.59,18.23 arc(33.44,18.13) 33.27,18.09 J15.2
N5281972: length 13.2
  TOP w0.2: J15.3 32.42,19.37 arc(32.77,19.43) 33.06,19.63 34.45,21.02 34.45,23.15 34.57,23.27 34.57,26.49 34.64,26.6 34.75,26.78 34.87,26.9 34.87,26.9 35.23,27.26 35.24,27.27 36.51,28.54 36.51,28.61 37.11,29.21 37.24,29.21 37.27,29.23 37.31,29.27 U26.11
N5281978: length 17.3
  TOP w0.2: 27.55,20.63 33.45,20.63 34.07,21.26 34.07,23.3 34.2,23.43 34.2,26.74 34.27,26.84 36.13,28.7 36.13,28.76 36.95,29.58 37.09,29.58 37.15,29.65 37.28,29.65 37.31,29.67 U26.10
N5281984: length 11.6
  TOP w0.2: J15.5 32.8,21.91 33.7,22.81 33.7,23.46 33.82,23.58 33.82,26.94 35.76,28.88 35.76,28.92 36.8,29.96 36.94,29.97 36.96,29.98 37,30.02 37.06,30.02 37.38,30.07 U26.9
N5281990: length 13.4
  TOP w0.2: v1(30,24.3) 29.42,24.3 28.3,23.18 J15.6 ; U26.8 36.96,30.47 arc(36.3,30.34) v1(35.75,29.97)
  BOTTOM w0.2: v1(30,24.3) 30.38,24.67 30.45,24.67 v1(35.75,29.97)
N5281996: length 9.9
  TOP w0.2: U26.7 36.31,30.87 36.28,30.85 35.76,30.64 35.49,30.53 33,28.04 32.93,27.86 32.62,27.56 32.05,25.75 J15.7
N5282002: length 12.4
  TOP w0.2: U26.6 36.67,31.27 36.35,31.24 36.24,31.24 35.61,30.99 35.27,30.84 32.68,28.25 32.61,28.08 32.15,27.62 arc(30.04,26.21) J15.8
N5282607: length 3.9
  TOP w0.2: U26.37 45.71,31.27 45.78,31.34 46.62,31.34 47.6,32.31 J17.1
N5282609: length 8.1
  TOP w0.2: U26.36 45.84,30.87 45.91,30.94 46.02,30.94 46.04,30.96 46.73,30.96 46.79,30.9 50.89,30.9 arc(50.97,30.91) 51.04,30.96 arc(51.13,31.02) 51.25,31.05 J17.2
N5282611: length 3.8
  TOP w0.2: U26.35 45.97,30.47 46.07,30.57 46.17,30.57 46.19,30.59 46.57,30.59 46.69,30.47 47.16,30.47 arc(47.62,30.38) 48,30.12 J17.3
N5282613: length 8.7
  TOP w0.2: U26.34 45.74,30.07 45.8,30.01 v1(46.33,30.01) ; v1(50.61,28.53) 52.82,28.53 J17.4
  BOTTOM w0.2: v1(46.33,30.01) 49.13,30.01 v1(50.61,28.53)
N5282615: length 4.7
  TOP w0.2: U26.33 45.37,29.67 arc(45.53,29.65) 45.69,29.61 45.88,29.53 arc(46.01,29.46) 46.13,29.36 46.58,28.91 46.58,28.91 46.74,28.75 46.74,28.75 46.88,28.61 arc(46.96,28.5) 46.98,28.37 46.98,27.89 47.07,27.77 47.07,27.77 arc(47.66,27.37) J17.5
N5282617: length 10.6
  TOP w0.2: U26.32 45.46,29.27 45.58,29.25 45.71,29.19 46.51,28.39 46.51,27.67 46.57,27.61 46.57,26.81 46.51,26.75 46.51,26.4 46.8,26.11 52.52,26.11 52.57,26.16 arc(52.65,26.14) 52.71,26.1 J17.6
N5282619: length 6.4
  TOP w0.2: U26.31 45.41,28.87 45.67,28.7 46.13,28.23 46.13,27.52 46.2,27.45 46.2,26.97 46.13,26.91 46.13,26.25 46.65,25.74 46.72,25.74 47.33,25.12 arc(47.8,24.8) J17.7
N5282621: length 10.7
  TOP w0.2: v1(50.63,25.36) 52.56,23.43 J17.8 ; v1(45.62,27.21) 45.62,28.22 45.43,28.41 45.33,28.47 U26.30
  BOTTOM w0.2: v1(50.63,25.36) 47.47,25.36 v1(45.62,27.21)
N5282705: length 8.8
  TOP w0.2: v1(42.8,23.87) 42.77,23.87 42.38,23.87 arc(42.12,23.92) 41.9,24.07 41.65,24.32 arc(41.32,24.82) 41.2,25.41 U26.21 ; v1(44.53,22.92) 44.53,21.04 J18.1
  BOTTOM w0.2: v1(44.53,22.92) 44.53,23.45 44.11,23.87 v1(42.8,23.87)
N5282707: length 11.8
  TOP w0.2: U26.20 40.8,24.6 arc(40.85,24.34) v1(41,24.12) ; J18.2 42.34,17.45 v1(42.34,17.47)
  BOTTOM w0.2: v1(41,24.12) 41,18.81 v1(42.34,17.47)
N5282709: length 6.9
  TOP w0.2: J18.3 42.1,21.29 arc(42.04,21.64) 41.84,21.93 40.98,22.79 arc(40.55,23.44) 40.4,24.2 U26.19
N5282711: length 11
  TOP w0.2: 40.84,16.42 40.84,21.83 arc(40.73,22.37) 40.42,22.83 arc(40.11,23.3) 40,23.84 U26.18
N5282713: length 6.3
  TOP w0.2: J18.5 39.56,22.6 arc(39.57,22.64) 39.6,22.68 U26.17
N5282715: length 11.1
  TOP w0.2: J18.6 38.29,24.78 arc(38.41,25.38) 38.75,25.88 38.88,26.01 arc(39.12,26.36) 39.2,26.78 U26.16
N5282717: length 6.9
  TOP w0.2: U26.15 38.8,26.79 arc(38.76,26.59) 38.65,26.43 37.77,25.55 arc(37.22,24.72) 37.03,23.75 J18.7
N5282719: length 12.5
  TOP w0.2: J18.8 35.75,24.84 arc(35.94,25.79) 36.48,26.6 37.95,28.07 U26.14
N5282803: length 9.9
  TOP w0.2: J19.1 48.35,20.22 v1(47.8,20.77) ; U26.29 44.84,27.53 arc(44.94,27.03) 45.23,26.6 46.52,25.32 46.55,25.27 46.55,23.79 v1(47.79,22.55)
  BOTTOM w0.2: v1(47.8,20.77) 47.8,22.01 47.79,22.02 v1(47.79,22.55)
N5282805: length 14
  TOP w0.2: U26.28 44,27.07 44.05,26.88 45.94,24.99 45.94,24.85 45.94,23.57 46.2,23.31 46.2,23.15 46.3,22.99 46.3,22.96 46.35,22.91 46.37,22.86 46.39,22.83 46.4,22.82 46.84,22.38 46.84,22.37 47.34,21.87 47.47,21.87 47.72,21.81 47.73,21.81 48.85,21.81 arc(50.15,21.55) 51.26,20.82 52.16,19.91 arc(52.67,19.15) J19.2
N5282807: length 13.3
  TOP w0.2: U26.27 43.6,26.8 43.61,26.78 43.61,26.7 43.78,26.53 43.87,26.53 45.57,24.83 45.57,23.41 45.83,23.15 45.83,17.77 46.62,16.97 J19.3
N5282809: length 19.8
  TOP w0.2: 52.85,15.71 47.15,15.71 arc(47.07,15.72) 47.01,15.76 46.83,15.76 45.44,17.15 45.44,17.76 45.44,17.76 45.44,17.83 44.12,19.14 43.78,19.14 43.62,19.31 43.62,22.53 43.92,22.83 43.92,23.15 43.92,23.18 44.08,23.34 44.08,23.54 44.3,23.76 44.42,24.04 44.42,25.36 43.85,25.94 43.63,26.15 43.63,26.15 43.24,26.54 43.24,26.63 43.22,26.64 43.22,26.65 43.2,26.88 U26.26
N5282811: length 16.3
  TOP w0.2: U26.25 42.8,26.54 42.86,26.47 42.86,26.38 43.67,25.58 43.67,25.57 44.05,25.2 44.05,24.12 43.98,23.97 43.78,23.76 43.77,23.76 43.71,23.68 43.71,23.5 43.58,23.36 43.54,23.19 43.54,22.99 43.24,22.69 43.24,19.15 43.63,18.77 43.97,18.77 45.07,17.67 45.07,17.61 45.07,17.61 45.07,16.97 47.34,14.7 arc(47.63,14.5) 47.98,14.44 J19.5
N5282813: length 21.4
  TOP w0.15: U26.24 42.4,26.44 42.51,26.33 42.51,26.24 42.75,26 42.75,26 43.36,25.39 43.36,23.64 43,23.28 42.4,23.28 v1(42.05,22.92) ; J19.6 51.15,13.16 51.05,13.27 v1(50.19,13.27)
  BOTTOM w0.15: v1(50.19,13.27) 49.84,13.63 49.72,13.63 43.62,19.73 43.62,20.34 42.05,21.91 v1(42.05,22.92)
N5282815: length 19.4
  TOP w0.2: v1(42.2,25.77) 42.2,26.03 42.2,26.06 42.16,26.09 42.16,26.13 42.05,26.24 42.05,26.33 42,26.51 U26.23 ; J19.7 48.33,11.87 v1(46.3,11.87)
  BOTTOM w0.2: v1(46.3,11.87) 46.3,14.02 arc(45.9,16.01) 44.78,17.69 42.42,20.05 41.47,21.81 41.47,23.23 41.51,23.28 41.51,23.81 41.58,23.88 41.58,24.36 41.51,24.43 41.51,24.78 arc(41.57,25.06) 41.73,25.3 v1(42.2,25.77)
N5282817: length 21.7
  TOP w0.2: U26.22 41.6,25.66 arc(41.65,25.39) 41.8,25.17 v1(42.13,24.84) ; v1(50.8,12.37) 50.8,11.93 52.1,10.62 J19.8
  BOTTOM w0.2: v1(42.13,24.84) 42.13,23.72 50.8,15.05 v1(50.8,12.37)
N5297541: length 8.4
  TOP w0.3: C140.1 6.4,11.35 R109.2 ; C140.1 7.38,11.35 arc(7.53,11.32) 7.65,11.24 7.66,11.23 7.66,11.13 7.88,10.91 7.88,10.04 7.95,9.79 arc(7.92,9.61) 7.82,9.46 7.74,9.4 7.49,9.15 6.85,9.15 6.68,9.32 arc(6.56,9.33) 6.44,9.35 6.24,9.41 arc(5.9,9.55) 5.62,9.77 5.41,9.98 arc(5.18,10.13) 4.9,10.19 arc(4.8,10.21) 4.71,10.27 arc(4.49,10.41) R119.2 ; C140.1 7.39,11.51 arc(7.51,11.7) 7.56,11.91 U28.6
N5297885: length 4.3
  TOP w0.18: U28.16 7.05,17.23 7.22,17.4 C143.1 7.55,17.65 7.73,17.83 8.17,17.83 8.2,17.8 D27.3
N5297889: length 21
  TOP w0.18: C143.2 7.96,17.4 v1(8.63,16.73)
  TOP w0.25: v1(8.63,16.73) 8.62,16.73 8.06,16.17 U28.14
  TOP w0.4: v1(11.53,12.35) 11.62,12.35 11.79,12.17 11.84,12.17 12.57,11.44 Q31.3
  TOP w0.6: L1.1 20.39,12.68 Q31.7 ; 15.04,12.84 14.6,12.84 14.6,12.79 13.24,11.44 Q31.3
  TOP w0.8: Q31.7 16.92,12.68 ; Q31.8 17.21,13.97
  TOP w0.9: Q31.8 Q31.7
  BOTTOM w0.4: v1(11.53,12.35) 10.8,12.35 10.45,12.7 10.44,12.7 10.35,12.79 9.94,12.79 9.93,12.79 9.49,12.79 8.65,13.63 8.65,16.02 8.63,16.04 v1(8.63,16.73)
N5298100: length 8.5
  TOP w0.2: U28.7 8.06,11.78 8.29,11.55 v1(8.29,11.39) ; R110.2 5.08,11.75 4.49,12.34 4.49,12.44 v1(4.39,12.53)
  TOP w0.3: R109.1 6.33,10.38 5.79,10.92 5.79,11.11 5.15,11.75 R110.2
  BOTTOM w0.2: v1(4.39,12.53) 4.93,12.53 5.04,12.65 6.38,12.65 7.64,11.39 v1(8.29,11.39)
N5300450: length 4.7
  TOP w0.2: D27.1 10.94,17.28 10.21,17.28 9.88,16.95 9.88,16.25 10.39,15.74 C149.1 10.41,15.74 10.41,15.42 arc(10.38,15.31) 10.29,15.24 10.07,15.15 U28.12
N5300470: length 14.9
  TOP w0.2: v1(10.41,13.94) 10.21,13.74 U28.10 ; R116.2 16.86,15.06 15.81,15.06 15.11,14.36 13.81,14.36 13.68,14.5 13.68,14.5 13.62,14.56 12.12,14.56 11.92,14.36 11.89,14.36 11.86,14.34 C142.1 11.42,14.32 11.42,14.07 11.64,13.85 v1(11.64,13.8)
  TOP w0.6: R116.2 19.94,14.74 L1.2
  BOTTOM w0.2: v1(11.64,13.8) 11.11,13.8 10.97,13.94 v1(10.41,13.94)
N5300474: length 16.1
  TOP w0.2: R116.1 15.5,16.42 15.5,15.28 14.96,14.74 13.97,14.74 13.83,14.87 13.77,14.93 11.96,14.93 11.9,14.87 11.59,14.87 11.45,14.74 C142.2 11.24,14.74 11.22,14.72 11.13,14.72 10.97,14.56 10.97,14.11 11.02,14.06 11.02,13.58 10.35,12.91 10.08,12.91 9.77,13.23 U28.9
  TOP w0.3: 14.01,18.79 C151.1 ; 14.01,18.79 14.06,18.85 R124.2 ; 14.01,18.79 arc(13.9,18.63) 13.86,18.43 arc(13.92,18.15) 14.08,17.9 14.46,17.52 R122.2
  TOP w0.6: R116.1 16.88,18.08 16.11,18.85 R124.2
N5300499: length 6.7
  TOP w0.3: v1(11.47,13.08) 11.47,13.08 11.49,13.06 11.83,13.06 12.19,12.71 12.87,12.71 ; v1(9.41,15.69) U28.13
  BOTTOM w0.3: v1(9.41,15.69) 9.41,13.62 9.71,13.32 10.14,13.32 10.15,13.31 10.15,13.31 10.58,13.31 10.81,13.08 v1(11.47,13.08)
N5300503: length 11.3
  TOP w0.3: U28.15 7.56,16.55 v1(7.75,16.74) ; v1(11.8,10.22) 11.83,10.22 12.13,10.16 Q31.4
  BOTTOM w0.3: v1(11.8,10.22) 10.26,10.22 8.92,11.55 8.92,12.44 7.77,13.59 7.77,16.14 7.75,16.16 v1(7.75,16.74)
N5300584: length 12.1
  TOP w0.3: v1(12.13,16) 12.31,16.18 R115.2 13.01,16.2 R122.1 13.01,18.54 arc(13.04,18.67) C151.2 ; U28.8 8.57,12.03 9.11,11.49 9.79,11.49 9.81,11.47 10.33,11.47 10.35,11.49 v1(11.55,11.49)
  BOTTOM w0.3: v1(12.13,16) 12.13,15.11 12.3,14.93 12.3,12.24 arc(12.08,11.71) v1(11.55,11.49)
N5302120: length 6.9
  TOP w0.2: 4.97,16.64 5.07,16.64 6.11,15.6 U28.1 ; 4.97,16.64 4.94,16.67 4.94,16.82 C139.1 ; 4.97,16.64 4.94,16.61 v1(4.94,16.15)
  TOP w0.25: v1(3.91,13.81) 3.8,13.81 3.43,13.44 3.43,13.39 arc(3.34,13.37) R113.2
  BOTTOM w0.25: v1(3.91,13.81) 4.56,14.46 4.56,15.77 v1(4.94,16.15)
N5302799: length 22.9
  TOP w0.2: R113.1 3.26,10.69 3.52,9.95 3.55,9.92 3.55,9.92 3.71,9.76 3.74,9.76 3.8,9.74 4.55,9.74 arc(4.7,9.71) 4.83,9.63 5.47,8.99 arc(5.65,8.87) 5.86,8.83 arc(6.07,8.78) 6.25,8.66 7.4,7.52 arc(7.79,6.93) U30.3
  TOP w0.5: 17.66,10.06 16.75,10.06 ; Q31.6 17.34,11.46
  TOP w0.6: 15.31,10.12 14.55,9.36 12.05,9.36 11.84,9.16 11.16,9.16 10.4,9.92 ; 10.4,9.92 10.4,8.27 8.37,6.24 U30.3 ; 10.4,9.92 C145.1
  TOP w1: Q31.6 Q31.5
  TOP w1.4: 17.86,10.06 17.66,10.06
N5307205: length 6.2
  TOP w0.2: U28.2 6.03,14.32 5.59,14.32 5.43,14.49 5.43,14.84 4.36,15.91 4.36,16.25 3.96,16.65 R117.1 R118.2
N5307428: length 11
  TOP w0.25: R119.1 4.23,7.97 4.24,7.96 R120.2 3.75,7.28 arc(3.54,7.23) 3.36,7.11 arc(3.17,6.99) 2.96,6.95 RT1.2 ; v1(5.11,13.46) 5.34,13.23 5.67,13.23 U28.4
  TOP w0.3: R119.1 3.66,8.99 v1(3.29,9.36)
  BOTTOM w0.25: v1(3.29,9.36) 3.29,9.92 3.29,9.92 3.29,12.51 3.99,13.21 4.16,13.21 4.42,13.46 5.1,13.46 arc(5.1,13.46) v1(5.11,13.46)
N5310551: length 2.4
  TOP w0.3: R121.2 11.4,4.81 11.11,5.1 C146.1
N5327580: length 1.7
  TOP w0.2: U26.53 40,34.66 39.96,34.7 39.96,35.23 40.19,35.46 R123.2
N5329171: length 34.3
  TOP w0.127: J26.1 50.75,50.82 v1(51.54,50.02) ; v1(34.65,33.27) 32.03,33.27 31.28,34.02 U19.26
  BOTTOM w0.127: v1(34.65,33.27) 41.74,33.27 51.54,43.07 v1(51.54,50.02)
N5329180: length 35.5
  TOP w0.127: U19.27 31.28,34.81 31.95,34.15 v1(32.37,34.15)
  BOTTOM w0.127: J26.2 51,52.31 51,50.12 43.7,42.82 43.7,35.8 42.18,34.28 40.38,34.28 39.97,34.69 33.52,34.69 32.98,34.15 v1(32.37,34.15)
N5329189: length 42.2
  TOP w0.127: v1(28.19,39.52) 27.84,39.17 27.84,38.34 27.85,38.32 27.85,37.62 27.9,37.57 27.9,37.39 29.34,35.95 29.45,35.95 29.78,35.62 U19.28
  BOTTOM w0.127: J26.3 51.57,57.52 51.57,59.37 50.92,60.02 48.69,60.02 34.64,45.97 34.64,45.89 34.33,45.58 33.97,45.58 28.54,40.15 28.54,39.87 v1(28.19,39.52)
N5329196: length 34.1
  TOP w0.127: U19.29 29.3,36.42 28.2,37.52 28.2,37.7 28.16,37.74 28.16,38.2 28.2,38.24 28.2,38.67 29.17,39.64 29.17,39.9 30.46,41.19 v1(30.96,41.19)
  BOTTOM w0.127: v1(30.96,41.19) 31.92,41.19 32.82,42.09 33.6,42.09 J26.4

## Copper pours and planes (outline as drawn; the poured copper is in the pictures)
VCC on TOP: 31.59,45.7 31.59,45.38 31.66,45.27 31.65,43.61 31.87,43.42 33.16,43.43 33.29,43.6 33.29,45.6 33.18,45.7
VCC on TOP: 22.09,25.94 17.06,25.9 16.43,26.67 16.43,36.64 16.21,36.82 13.68,36.82 13.26,36.49 12.85,36.49 12.65,36.8 10.13,36.81 9.94,36.96 5.09,41.1 5.1,50.32 4.9,50.49 1.28,50.49 1.29,51.63 4.99,51.63 5.1,51.77 6.45,51.77 6.69,51.53 6.68,46.56 7.54,45.09 9.42,44.03 10.79,40.87 15.32,40.87 18.03,39.41 18.03,37.12 17.74,36.84 17.47,36.84 17.22,36.64 17.22,27.62 17.4,27.43 19.76,27.44 19.76,27.53 19.8,27.58 19.92,27.58 19.97,27.53 19.96,26.75 20.01,26.7 21.58,26.71 22.24,30.08 22.63,30.08 22.61,26.53
VCC on TOP: 39.91,36.88 39.91,36.37 41.49,34.6 41.75,34.6 41.8,35.65 42.24,36.06 41.26,36.88
VIN_SOLAR on TOP: 5.98,3.35 5.89,3.25 5.9,1.19 5.98,1.11 18.99,1.11 25.99,3.93 26.82,7.57 32.24,11.79 31.28,12.88 26.96,12.89 25.1,5.07 25.09,5.07 18.76,3.95 10.75,3.97 9.67,3.36
0 on TOP: 8.56,18.84 8.56,18.07 8.59,18.05 8.56,14.84 11.51,15.45 12.38,18.11 12.66,18.11 12.74,18.19 13.29,18.2 13.36,18.11 15.28,18.11 15.36,18.04 15.41,15.02 15.42,14.32 12.42,14.25 11.91,12.83 8.66,12.84 8.68,11.38 8.67,9.11 8.61,9.05 5.95,9.04 5.49,8.56 5.51,0 46.43,0 46.43,11.24 41.77,15.9 28.01,15.9 25.94,17.98 20.95,16.56 16.02,18.93 16.02,23.77 13.01,23.76 12.04,18.81 8.56,18.85
0 on TOP: 0,0 0,60.57 55,60.57 55,0 46.7,0 46.7,11.45 41.8,16.25 28.01,16.21 26.14,18.06 21.79,18.08 16.05,23.93 12.91,23.93 11.94,19.17 8.49,19.17 8.31,18.93 8.29,18.35 8.33,18.06 8.33,18.05 8.5,14.75 11.64,15.39 12.46,18.04 15.22,18.04 15.27,17.98 15.27,14.38 12.18,14.41 11.69,12.97 8.77,13.01 8,12.72 7.68,11.73 7.68,9.25 5.91,9.23 5.33,8.66 5.33,0 ; 1 cut-out
0 on BOTTOM: 8.56,18.81 10.08,15.47 11.52,15.46 12.4,18.16 15.36,18.15 15.42,12.9 15.38,14.7 12.27,14.74 8.68,11.19 8.66,9.1 8.61,9.05 5.95,9.04 5.49,8.57 5.51,0 46.43,0 46.43,11.24 41.77,15.9 28.01,15.9 28.01,15.9 26.51,17.41 25.19,18.73 20.99,18.7 16,23.77 13.01,23.76 12.04,18.81
0 on BOTTOM: 0,0 0,60.57 55,60.57 55,0 46.7,0 46.7,11.45 41.8,16.25 28.01,16.21 25.28,18.93 21.07,18.95 16.29,23.82 12.89,23.83 11.9,18.96 8.37,18.97 10.02,15.39 11.59,15.4 12.46,18.04 15.26,18.04 15.27,14.95 12.24,14.94 10.37,13.17 8.35,11.24 8.34,9.36 6.82,9.41 6.65,9.24 5.91,9.24 5.33,8.66 5.33,0
V_5V_BEFORE_R on TOP: 10.86,39.62 10.86,37.58 11,37.44 16.03,37.45 16.41,38.1 15.85,39.74 10.97,39.73
VMAIN_6V on TOP: 42.31,8.36 37.58,8.34 32.96,13.5 26.24,13.49 23.24,16.68 21.2,16.69 15.22,19.51 15.19,33.41 15.06,33.52 10.62,33.51 13.89,36.68 16.14,36.68 16.26,36.57 16.32,23.39 21.82,17.83 25.04,17.83 27.59,14.85 33.99,14.84 36.3,12.37 44.83,12.36 44.84,11.8
N5297889 on TOP: 14.57,14.04 14.58,12.75 14.76,12.55 18.29,12.56 18.29,14.24 14.77,14.24
N5302799 on TOP: 14.51,11.36 14.51,9.8 14.93,9.33 18.37,9.33 18.37,11.59 14.68,11.6

## Text on the board
DISPLAY_BOTTOM: FIGURE | FINISHED_SIZE | 0.3302 | 0.9139 | 2.794 | 2.2 | 2.5x1.0 | DRILL CHART: TOP to BOTTOM | ALL UNITS ARE IN MILLIMETERS | ROTATION | - | 0.000 | 90.000 | PLATED | NON-PLATED | QTY | 214 | 33 | 4 | 2
